# Altium PCB nRF24LU1+ Reference PCB Layout_rev1_0.PcbDoc
Units mil, origin at the board's own origin, x right, y up, seen from the top; angles counter-clockwise.
Board outline 689 x 631 mil, 2 copper layers (Top Layer, Bottom Layer); 23 components, 26 nets, 78 pads, 41 vias.
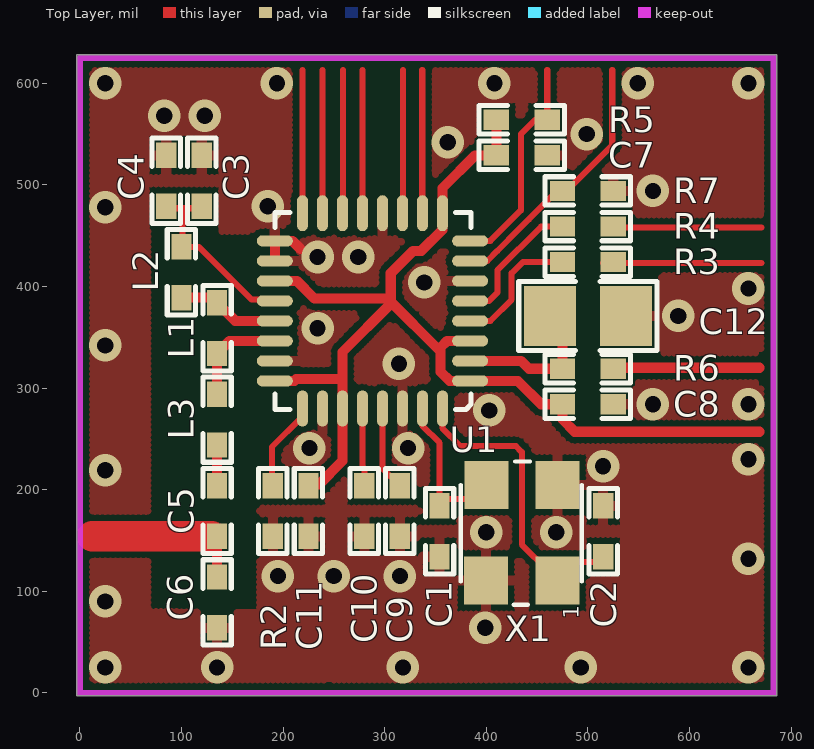
[diagram p0: Top Layer view]
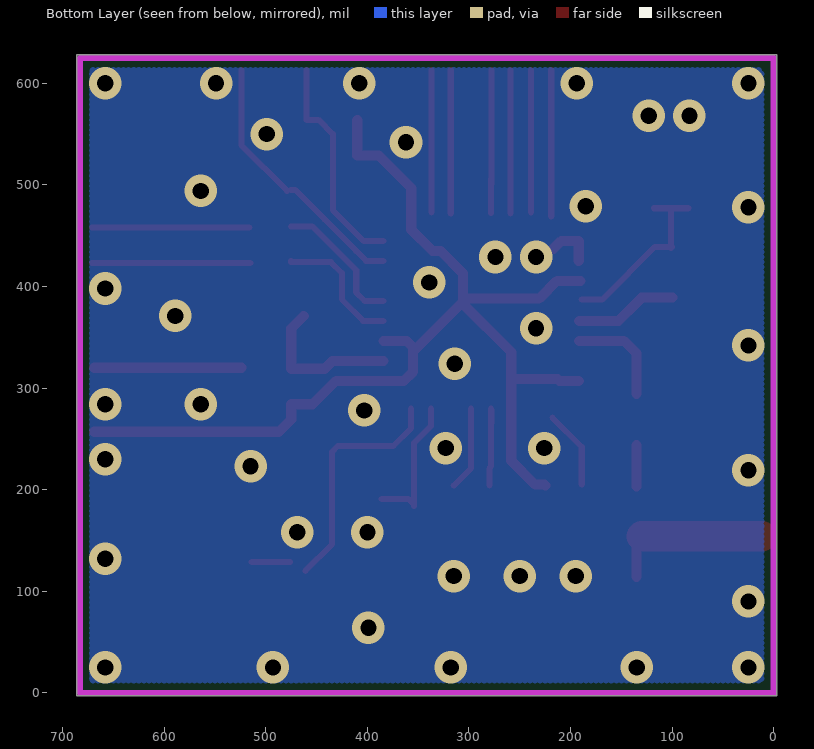
[diagram p1: Bottom Layer view, seen from below]

## Layer stack, top to bottom
Top Layer: signal copper 1.4
Dielectric: dielectric 12.6, FR-4, Dk 4.8
Bottom Layer: signal copper 1.4

## Board outline
-3,628 -3,-3 686,-3 686,628 -3,628

## Design rules (kind name [scope] priority, off if disabled: settings)
Clearance [All] p1: gap=6
ComponentClearance [All] p1 off: gap=5 collisioncheckmode=3 verticalgap=5
Height [All] p1 off: minheight=0 maxheight=1000 prefheight=500
PolygonConnect PolygonConnect_1 [isVia and innet(gnd)] p1: connectstyle=Direct reliefconductorwidth=10 reliefentries=4 polygonreliefangle="90 Angle"
PolygonConnect [All] p2: connectstyle=Relief reliefconductorwidth=10 reliefentries=4 polygonreliefangle="90 Angle"
RoutingVias [All] p1: holewidth=16 width=32 viastyle="Through Hole" minholewidth=1 minwidth=1 maxholewidth=28 maxwidth=50
SolderMaskExpansion [All] p1: expansion=3
TestPointUsage [All] p1: valid=0 allowmultiple=FALSE
Testpoint [All] p1: side=15 testpointundercomponent=TRUE minsize=40 maxsize=100 preferedsize=60 minholesize=0 maxholesize=40 preferedholesize=32 testpointgrid=1 style=1023 order=0-112345678
Width [All] p1: maxlimit=100 minlimit=1 preferedwidth=10 toplayer_prefwidth=6 bottomlayer_prefwidth=6 minimp=50.000000 maximp=50.000000 favimp=50.000000
17 further rules are at their usual default settings.

## Components (designator, comment, footprint, x,y, rotation, side; value= is the part's Value field where it differs from the comment)
C1 "NPO, +/-2% 50V" 0402s 354,159 r270 top
C2 "NPO, +/-2% 50V" 0402s 515,159 r270 top
C3 "X7R 16V" 0402s 120,504 r270 top
C4 "NP0 50V" 0402s 85,504 r270 top
C5 "NP0 +/-0.1pF, 50V" 0402s 135,179 r90 top
C6 "NP0 +/-0.1pF, 50V" 0402s 135,89 r270 top
C7 "X7R, +/-10% 50V" 0402s 435,529 r0 top
C8 "X7R, +/-10% 50V" 0402s 500,284 r0 top
C9 "X7R, +/-10% 50V" 0402s 315,179 r270 top
C10 "X7R, +/-10% 50V" 0402s 280,179 r270 top
C11 "X7R, +/-10% 50V" 0402s 225,179 r270 top
C12 "X5R +/-10%, 6.3v" 0805 500,371 r0 top
L1 "Murata LQP15MN6N8B02D" 0402s 135,359 r270 top
L2 "Murata LQP15MN6N8B02D" 0402s 100,414 r270 top
L3 "Murata LQP15MN4N7B02D" 0402s 135,269 r270 top
R2 "1%" 0402s 190,179 r90 top
R3 "5%" 0402s 500,424 r0 top
R4 "5%" 0402s 500,459 r0 top
R5 "5%" 0402s 435,564 r180 top
R6 "5%" 0402s 500,319 r0 top
R7 "5%" 0402s 500,494 r180 top
U1 "nRF24LU1+" QFN32L/5x5 288,376 r180 top
X1 "TSX-3225, 16MHz, Cl=9pF, +/-10ppm" "bt-xtal 3225" 455,110.67 r90 top

## Footprints (in the part's own frame and the unit in brackets; to place one, negate y for a bottom-side part, rotate by r counter-clockwise, add the part's x,y. Pads: shape width x height; smd on the part's side, far side on the other; paste and mask are expansions set on the pad)
0402s [mil]
  rect 25x20 smd: 1(-25,0) 2(25,0)
  silkscreen extent -42,-14 42,14
0805 [mm]
  rect 1.3x1.5 smd: 1(-0.95,0) 2(0.95,0)
  silkscreen extent -1.73,-0.86 1.73,0.86
"bt-xtal 3225" [mm] "Mercury X32 series"
  rect 1.2x1.1 smd: 1(0,-0.381) 2(2.388,-0.381) 3(2.388,1.397) 4(0,1.4)
  silkscreen extent -0.61,-0.99 2.97,2.03
QFN32L/5x5 [mm]
  oval 0.9x0.28 smd: 1(-2.441,1.75) 2(-2.441,1.25) 3(-2.441,0.75) 4(-2.441,0.25) 5(-2.441,-0.25) 6(-2.441,-0.75) 7(-2.441,-1.25) 8(-2.441,-1.75) 17(2.441,-1.75) 18(2.441,-1.25) 19(2.441,-0.75) 20(2.441,-0.25) 21(2.441,0.25) 22(2.441,0.75) 23(2.441,1.25) 24(2.441,1.75)
  oval 0.28x0.9 smd: 9(-1.75,-2.441) 10(-1.25,-2.441) 11(-0.75,-2.441) 12(-0.25,-2.441) 13(0.25,-2.441) 14(0.75,-2.441) 15(1.25,-2.441) 16(1.75,-2.441) 25(1.75,2.441) 26(1.25,2.441) 27(0.75,2.441) 28(0.25,2.441) 29(-0.25,2.441) 30(-0.75,2.441) 31(-1.25,2.441) 32(-1.75,2.441)
  silkscreen extent -2.46,-2.46 2.44,2.46

## Part data
C1 C2 C7 C8 C9 C10 C11: library part CAP
C3 C4 C5 C6: library part Cap, "Capacitor"
C12: library part "Cap Pol3", "Polarized Capacitor (Surface Mount)"
L1 L2 L3: library part Inductor, "Inductor"
R2 R3 R4 R5 R6: library part RES2
R7: library part RES2, "Resistor"
U1: "2.4GHz Transceiver with USB"
X1: library part BT-XTAL

## Via types
v1: diameter 32, hole 16, Top Layer to Bottom Layer, tented both sides, 41 vias

## Nets (pads, with @x,y where several pads share a name; then routed paths per layer and width w, separated by ;. In a path a pad name is that pad's centre, name@x,y a point inside that pad or via, vN(x,y) a via of type N, cw(c..) or ccw(c..) an arc to the next point about the centre after c; other vN are vias at no path point)
D+: R3.2 | length 156
  Top Layer w6: R3.2@515,423 671,423
D-: R4.2 | length 155
  Top Layer w6: R4.2@516,458 671,458
GND: C1.2 C2.1 C3.1 C4.1 C6.2 C7.2 C8.2 C9.2 C10.2 C11.2 C12.2 R2.1 R7.1 U1.6 U1.12 U1.17 U1.18 U1.23 U1.26 U1.30 X1.2 X1.4 | length 48
  Top Layer w10: U1.18@192,425.21 192,444.9 209.1,444.9 217,437
  other v1: 25,25 135,25 318,25 493,25 658,25 399,64 25,90 195,115 250,115 315,115 658,132 400,158 469,158 25,219 515,223 658,230 226,241 323,241 403,278 564,284 658,284 314,324 25,342 234,359 589,371 658,398 339,404 234,429 274,429 25,478 185,479 564,494 362,542 499,550 83,568 123,568 25,600 194,600 408,600 549,600 658,600
NetC1_1: C1.1 U1.31 X1.3 | length 137.3
  Top Layer w6: U1.31 337.21,262.79 354,246 C1.1 ; C1.1@354,185 360,191 X1.3@386,191
NetC2_2: C2.2 U1.32 X1.1 | length 272.9
  Top Layer w6: U1.32 356.9,260.66 374.56,243 429,243 435,237 435,146 X1.1@461,120 ; X1.1@476,129 C2.2@514,129
NetC3_2: C3.2 C4.2 L2.1 U1.20 | length 183.5
  Top Layer w6: C4.2@84,477 C3.2@118,477 ; L2.1 117,439 169,387 U1.20@189,387 ; L2.1@101,438 101,477
NetC5_1: C5.1 C6.1 | length 158
  Top Layer w10: C6.1 C5.1
  Top Layer w30: 12,154 C5.1@130,154
NetC5_2: C5.2 L3.2 | length 41
  Top Layer w10: C5.2@135,203 L3.2
NetC9_1: C9.1 U1.29 | length 83
  Top Layer w6: U1.29 297.84,221.16 C9.1
NetC10_1: C10.1 U1.28 | length 90.7
  Top Layer w6: U1.28@278,265 U1.28@278,279 ; U1.28 278.16,222.84 280,221 C10.1
NetC12_1: C12.1 R6.1 U1.2 | length 151.3
  Top Layer w10: U1.2 434.21,326.79 442,319 R6.1 475,358.6 C12.1
NetL1_1: L1.1 L2.2 U1.21 | length 101.4
  Top Layer w10: L2.2 130,389 L1.1 152.84,366.16 U1.21
NetL1_2: L1.2 L3.1 U1.22 | length 102.1
  Top Layer w10: L3.1 L1.2 147.47,346.47 U1.22
NetR2_2: R2.2 U1.25 | length 78
  Top Layer w6: R2.2@189,205 189,242 U1.25@218,271
NetR3_1: R3.1 U1.4 | length 131.1
  Top Layer w6: U1.4 404.16,366.16 425,387 425,413 436,424 R3.1 R3.1@475,425
NetR4_1: R4.1 U1.5 | length 134.1
  Top Layer w6: U1.5 402.84,385.84 411,394 411,416 454,459 R4.1
P0.0/SCK/TCK: U1.10 | length 140
  Top Layer w6: U1.10@337,473 337,613
P0.1/MOSI/TMS: U1.11 | length 141
  Top Layer w6: U1.11@318,472 318,613
P0.2/MISO/TDI: U1.13 | length 145.4
  Top Layer w6: 278,501 278,613 ; U1.13@278.16,472.46 278.16,505.84
P0.3/CSN/TDO: U1.14 | length 141
  Top Layer w6: U1.14@259,472 259,613
P0.4: U1.15 | length 140
  Top Layer w6: U1.15@239,473 239,613
P0.5: U1.16 | length 144
  Top Layer w6: U1.16@219,469 219,613
PROG: R7.2 U1.7 | length 271.2
  Top Layer w6: U1.7 U1.7@401.21,425.21 ; 410.94,434.94 U1.7@401.21,425.21 ; R7.2@475,495 471,495 442,466 U1.7@401.21,425.21 ; R7.2@479,494 524,539 524,613
RESET: R5.1 U1.8 | length 218.2
  Top Layer w6: U1.8 403.9,444.9 434,475 434,550 448,564 R5.1 460,613
VBUS: R6.2 | length 145
  Top Layer w10: R6.2@524,320 669,320
VDD: C7.1 C8.1 C11.1 R5.2 U1.1 U1.3 U1.9 U1.19 U1.24 U1.27 | length 1122.6
  Top Layer w10: U1.19@190.54,405.53 213.47,405.53 231,388 303,388 355,336 ; U1.24 210.9,307.1 211,307 213,309 258.47,309 ; C11.1 226,205 235,205 258.47,228.47 258.47,335.47 306,383 306,413 328,435 336,435 356.9,455.9 356.9,496.9 389,529 C7.1 R5.2 ; U1.3 361.47,346.47 355,340 355,316 363.9,307.1 U1.1 384.21,307 431,307 454,284 C8.1 475,269 487,257 669,257

## Polygon pours and split planes (outlines as drawn)
GND on Top Layer "Bottom Layer-No Net" (hatched 90Degree grid 5 track 7, remove dead copper, pour order 1000): 0,625 0,0 683,0 683,625 0,625
GND on Bottom Layer "Bottom Layer-No Net" (hatched 90Degree grid 5 track 7, remove dead copper, pour order 1001): 0,624 0,0 683,0 683,625 0,625

## Keep-outs
Keep-Out Layer:
  lines w6: 0,0 683,0 683,625 0,625 0,0

## Other copper
Top Layer:
  pour cut-out: 438.5,511 438.5,517 475.5,517 475.5,511
  pour cut-out: 496.5,313 503.5,313 503.5,277 496.5,277
  pour cut-out: 501,511 508,511 508,475 501,475
  pour cut-out: 501,405 508,405 508,338 501,338
  pour cut-out: 292.5,494 303.5,494 303.5,490 292.5,490
  pour cut-out: 67,454 177,454 177,79 67,80.12

## Text inside footprints (layer, text, board x,y; h text height)
X1: Top Overlay "1" at 491,73 h15 r90